# Altium PCB AB-Amplifier.PcbDoc
Units mil, origin at the board's own origin, x right, y up, seen from the top; angles counter-clockwise.
Board outline 6000 x 4000 mil, 2 copper layers (Top Layer, Bottom Layer); 50 components, 32 nets, 113 pads, 0 vias.
Unrouted connection lines stored in the file: 73.
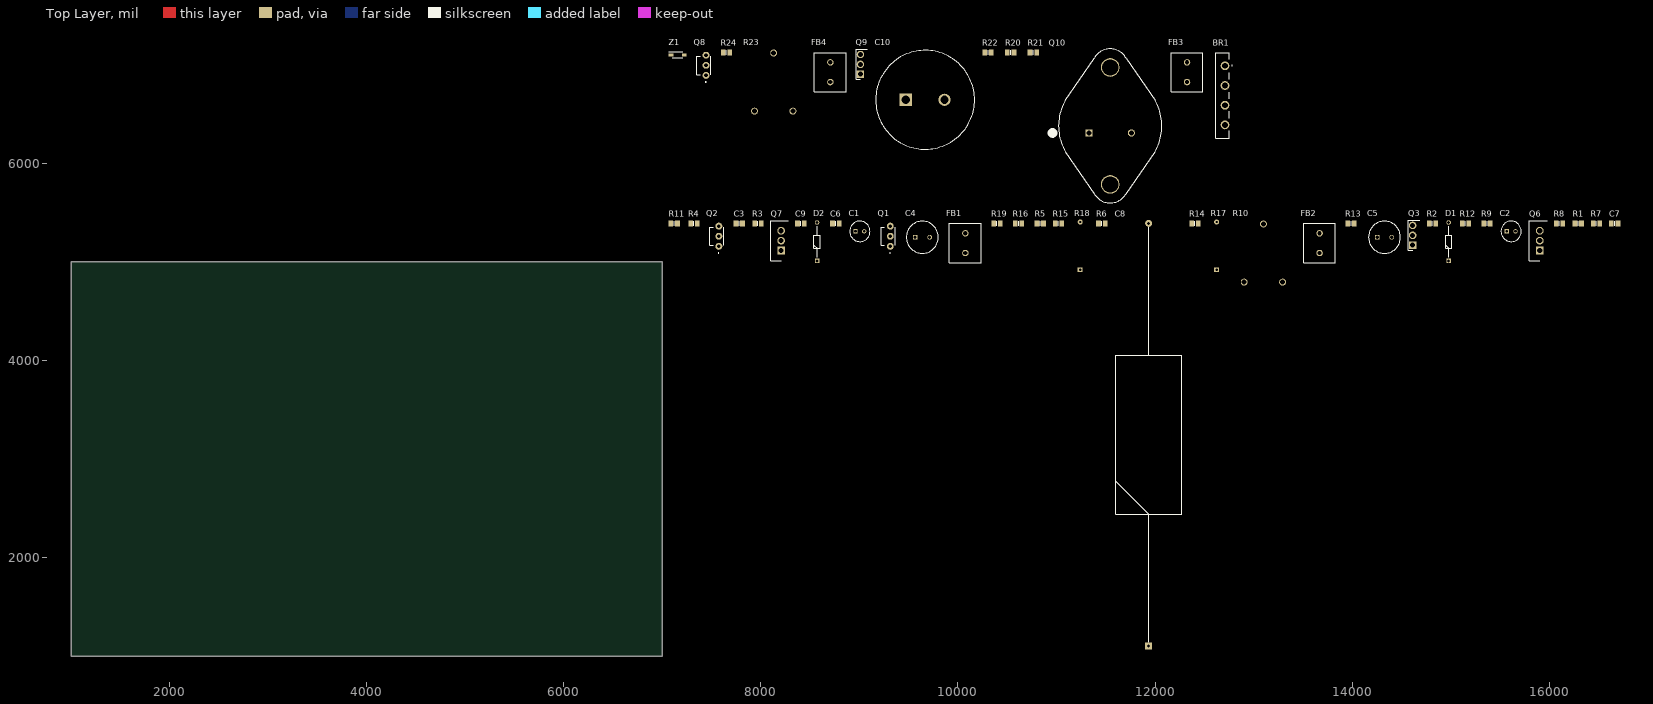
[diagram p0: Top Layer view]
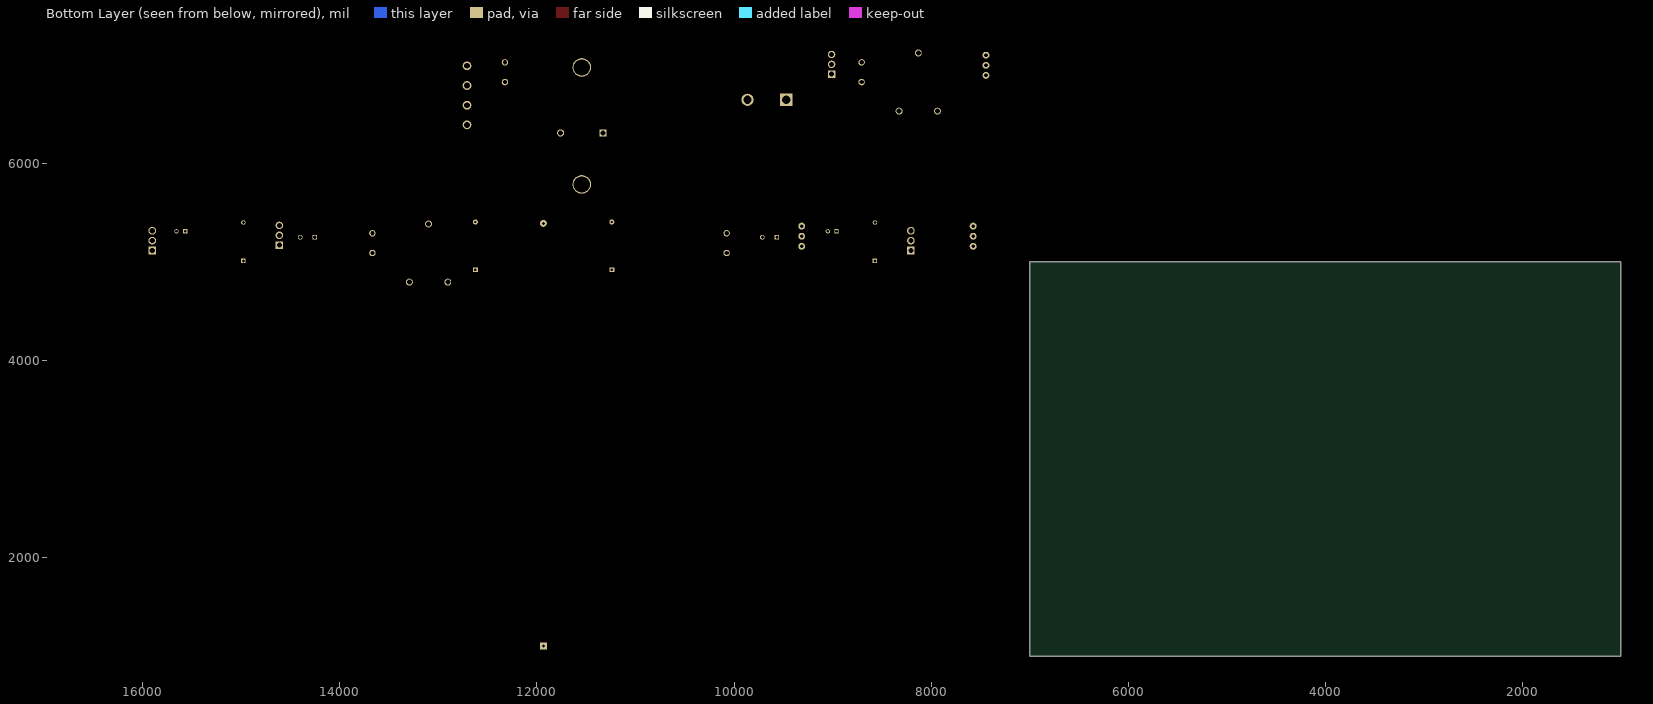
[diagram p1: Bottom Layer view, seen from below]

## Layer stack, top to bottom
Top Solder: solder mask 0.4, Solder Resist, Dk 3.5
Top Layer: signal copper 1.4
Dielectric 1: dielectric 12.6, FR-4, Dk 4.8
Bottom Layer: signal copper 1.4
Bottom Solder: solder mask 0.4, Solder Resist, Dk 3.5

## Board outline
1000,1000 7000,1000 7000,5000 1000,5000

## Design rules (kind name [scope] priority, off if disabled: settings)
Clearance [All] p1: gap=10 ignorepadtopadclearanceinfootprint=FALSE
PolygonConnect [All] p1: connectstyle=Relief reliefconductorwidth=10 reliefentries=4 polygonreliefangle="90 Angle" airgapwidth=10
RoutingVias [All] p1: holewidth=28 width=50 viastyle="Through Hole" minholewidth=28 minwidth=50 maxholewidth=28 maxwidth=50
SolderMaskExpansion [All] p1: expansion=4 istentingtop=FALSE
SupplyNets "Schematic Supply Nets_1" [InNet('GND')] p1: voltage=0.000
SupplyNets "Schematic Supply Nets" [InNet('VCC')] p2: voltage=0.000
Width [All] p1: maxlimit=10 minlimit=10 preferedwidth=10
30 further rules are at their usual default settings.

## Classes and differential pairs
component class Voeding: BR1 C10 FB3 FB4 Q8 Q9 Q10 R20 R21 R22 R23 R24 Z1
component class AB_Amplifier: " C8" C1 C2 C3 C4 C5 C6 C7 C9 D1 D2 FB1 FB2 Q1 Q2 Q3 Q4 Q5 Q6 Q7 R1 R2 R3 R4 R5 R6 R7 R8 R9 R10 R11 R12 R13 R14 R15 R16 R17 R18 R19

## Components (designator, comment, footprint, x,y, rotation, side; value= is the part's Value field where it differs from the comment)
BR1 "Bridge Rectifier" GBU4KE351 12710,6990 r90 top
C1 "1.0uF +" 106CKR050M 8960,5310 r0 top
C2 "10uF +" 106CKR050M 15570,5310 r0 top
C3 "47pF" 0805 7780,5390 r0 top
C4 "100uF +" 107CKR050M 9565,5250 r0 top
C5 "100uF +" 107CKR050M 14255,5250 r0 top
C6 "20pF" 0805 8760,5390 r0 top
C7 "0.1 µF" 0805 16665,5390 r0 top
C8 "2200uF +" 2200cap 11935,1100 r90 top
C9 "0.1 µF" 0805 8405,5390 r0 top
C10 "4700uF +" "Elco 4700uF" 9470,6645 r0 top
D1 "1N4148" 1N4148 14980,5010 r90 top
D2 "1N4148" 1N4148 8570,5010 r90 top
FB1 "Connector" Connector 10075,5090 r90 top
FB2 "Connector" Connector 13670,5090 r90 top
FB3 "Connector" Connector 12325,6825 r90 top
FB4 "Connector" Connector 8705,6825 r90 top
Q1 "BC557CG" BC557 9290,5225 r90 top
Q2 "BC547BG" BC547 7550,5225 r90 top
Q3 "BD139G" BD139 14615,5170 r90 top
Q6 "BDW93C" BDW94C 15905,5115 r90 top
Q7 "BDW94C" BDW94C 8205,5115 r90 top
Q8 "BC547BG" BC547 7420,6960 r90 top
Q9 "BD139G" BD139 9010,6905 r90 top
Q10 "2N3055A" 2N3055 11545,6380 r90 top
R1 "47K" 0805 16295,5390 r0 top
R2 "220K" 0805 14815,5390 r0 top
R3 "120K" 0805 7970,5390 r0 top
R4 "1.2K" 0805 7320,5390 r0 top
R5 "120Ω" 0805 10835,5390 r0 top
R6 "10K" 0805 11460,5390 r0 top
R7 "1.8K" 0805 16480,5390 r0 top
R8 "1.8K" 0805 16105,5390 r0 top
R9 "2K" 0805 15370,5390 r0 top
R10 "5K" "Potentiometer 15mm" 13100,5090 r0 top
R11 "12Ω" 0805 7120,5390 r0 top
R12 "390Ω" 0805 15150,5390 r0 top
R13 "180Ω" 0805 13990,5390 r0 top
R14 "470Ω" 0805 12405,5390 r0 top
R15 "470Ω" 0805 11020,5390 r0 top
R16 "180Ω" 0805 10615,5390 r0 top
R17 "0.33Ω" "0.33 1W" 12625,4920 r90 top
R18 "0.33Ω" "0.33 1W" 11240,4920 r90 top
R19 "10Ω" 0805 10395,5390 r0 top
R20 "1.5K" 0805 10535,7125 r0 top
R21 "22K" 0805 10765,7125 r0 top
R22 "3.3K" 0805 10305,7125 r0 top
R23 "1K" "Potentiometer 15mm" 8130,6825 r0 top
R24 "1.8K" 0805 7650,7125 r0 top
Z1 "Zener Diode 15V" "Zener Diode" 7155,7100 r0 top

## Footprints (in the part's own frame and the unit in brackets; to place one, negate y for a bottom-side part, rotate by r counter-clockwise, add the part's x,y. Pads: shape width x height; smd on the part's side, far side on the other; paste and mask are expansions set on the pad)
"0.33 1W" [mm]
  rect 1.27x1.27 hole 0.6: 1(0,0)
  round 1.27 hole 0.6: 2(12.319,0)
  body extent 1.14,-1.78 11.18,1.78, height 0.25
1N4148 [mm]
  rect 1.15x1.15 hole 0.75: 1(0,0)
  round 1.15 hole 0.75: 2(9.9,0)
  silkscreen extent 0.92,-0.81 8.98,0.81, body extent -0.28,-0.87 10.18,0.87, height 1.75
2N3055 [mm] "TO-204, Pin Spacing 10.92mm, Lead Dia. 1.09 mm (max)"
  rect 1.85x1.85 hole 1.35: 1(-1.815,5.46)
  round 1.85 hole 1.35: 2(-1.815,-5.46)
  round 4.8 hole 4.19 mask+0.102: 3(-15.075,0) 4(15.075,0)
  silkscreen extent -19.85,-13.33 19.85,15.5, body extent -19.84,-13.33 19.84,13.33, height 8.51
106CKR050M [mm] "10uF"
  rect 1.1x1.1 hole 0.7: 1(0,0)
  round 1.1 hole 0.7: 2(2.25,0)
  silkscreen extent -1.5,-2.62 3.75,2.62, body extent -1.61,-2.75 3.88,2.75, height 12.5
107CKR050M [mm] "100uF"
  rect 1.2x1.2 hole 0.8: 1(0,0)
  round 1.2 hole 0.8: 2(3.75,0)
  silkscreen extent -2.25,-4.12 6,4.12, body extent -2.36,-4.25 6.12,4.25, height 13
0805 [mm]
  rect 1.2x1.45 smd: 1(-0.85,0) 2(0.85,0)
  silkscreen extent 0,-0.53 0,0.53, body extent -1,-0.63 1,0.63, height 1.05
2200cap [mil]
  rect 70x70 hole 31.5: 1(0,0)
  round 70 hole 31.5: 2(4291.34,0)
  silkscreen extent 37,-335 4254,335, body extent -12,-354 4303,354, height 708
BC547 [mm]
  round 1.778 hole 0.96: 1(-1.7,-0.585) 2(0.9,-0.585) 3(3.5,-0.585)
  silkscreen extent -3.5,-1.81 3.28,1.81, body extent -2.2,-2.42 3.96,1.71, height 8.67
BC557 [mm]
  round 1.778 hole 0.96: 1(-1.7,-0.585) 2(0.9,-0.585) 3(3.5,-0.585)
  silkscreen extent -3.5,-1.81 3.28,1.81, body extent -2.2,-2.42 3.96,1.71, height 8.67
BD139 [mm]
  rect 1.92x1.92 hole 1.28: 1(0,0)
  round 1.92 hole 1.28: 2(2.54,0) 3(5.08,0)
  silkscreen extent -1.36,-1.77 6.44,1.13, body extent -1.16,-1.27 6.24,1.13, height 13.08
BDW94C [mm]
  rect 1.98x1.98 hole 1.32: 1(0,0)
  round 1.98 hole 1.32: 2(2.55,0) 3(5.1,0)
  silkscreen extent -2.65,-1.88 7.75,2.72, body extent -2.55,-1.88 7.65,2.72, height 20.08
Connector [mm]
  round 1.65 hole 1.1: 1(0,0) 2(5.08,0)
  silkscreen extent -2.54,-4.1 7.62,4.1, body extent -2.51,-4.11 8.25,4.09, height 9.84
"Elco 4700uF" [mm]
  rect 3.15x3.15 hole 2.1: 1(0,0)
  round 3.15 hole 2.1: 2(10,0)
  silkscreen extent -7.75,-12.75 17.75,12.75, body extent -8,-13 18,13, height 32
GBU4KE351 [mm] "Bridge Rectifier"
  round 2.235 hole 1.49: 1(0,0) 2(-5.08,0) 3(-10.16,0) 4(-15.24,0)
  silkscreen extent -18.64,-1.9 3.4,2.32, body extent -18.64,-1.11 3.4,2.32, height 18.9
"Potentiometer 15mm" [mil]
  round 70 hole 51.18: 1(-195,-295) 2(0,295) 3(195,-295)
  body extent -320,-349 320,345, height 10
"Zener Diode" [mm]
  rect 1.2x0.75 smd: 1(-1.7,0) 2(1.7,0)
  silkscreen extent -2.3,-0.77 1.35,0.77, body extent -1.85,-0.89 1.85,0.89, height 1

## Part data
BR1: library part GBU4K-E3_51, Arrow Part Number=GBU4K-E3/51, Manufacturer_Name=Vishay, Mouser Part Number=625-GBU4K-E3/51, Arrow Price/Stock=https://www.arrow.com/en/products/gbu4k-e351/vishay?region=europe, Datasheet Link=https://4donline.ihs.com/images/VipMasterIC/IC/VISH/VISH-S-A0001811512/VISH-S-A0001811512-1.pdf?hkey=6D3A4C79FDBF58556ACFDE234799DDF0, Height=18.8mm, Manufacturer_Part_Number=GBU4K-E3/51, Mouser Price/Stock=https://www.mouser.co.uk/ProductDetail/Vishay-General-Semiconductor/GBU4K-E3-51?qs=nHKQP18abP9%2FYmEys%252Budwg%3D%3D
C1: library part "Elco - 1.0uF"
C2: library part "Elco - 10uF"
C3 C6 C7 C9: library part "Capasitor - 0805"
C4 C5: library part "Elco - 100uF"
C8: library part "Elco - 2000uF"
C10: library part "Elco 4700uF"
D1 D2: library part "Diode - 1N4148", "Fast Switching Diode, 100 V, 0.15 A, -65 to 150 degC, 2-Pin?SOD123, RoHS, Tape and Reel", If - Forward Current=0.15A, Ir - Reverse Current=1uA, Manufacturer=DiodesIncorporated, Max Surge Current=2A, Maximum Operating Temperature=+150C, Minimum Operating Temperature=-65C, Operating Temperature Range=-65Cto+150C, Package / Case=SOD-123, Package Reference=SOD123-2, Peak Reverse Voltage=100V, Vf - Forward Voltage=1.25V, Brand=DiodesIncorporated, Configuration=Single, Datasheet URL=http://www.farnell.com/datasheets/1915529.pdf, Datasheet Version="Rev. 24-2, 10/2013", Factory Pack Quantity=3000, Height=1.25mm, Length=2.85mm, Manufacturer URL=http://www.diodes.com/, Mounting Style=SMD/SMT, Package URL=http://www.diodes.com/datasheets/ds18004.pdf, Packaging=Reel, Product=SwitchingDiodes, Product Category=Diodes-GeneralPurpose,Power,Switching, Recovery Time=4ns, RoHS=True, Series=1N4148, Type=SwitchingDiode, Unit Weight=0.000353oz, Width=1.7mm
FB1 FB2 FB3 FB4: "Ferrite Bead", Arrow Part Number=ACML-0805-500-T, Manufacturer_Name=ABRACON, Mouser Part Number=815-ACML-0805-500T, Arrow Price/Stock=https://www.arrow.com/en/products/acml-0805-500-t/abracon, Datasheet Link=https://abracon.com/Magnetics/new/ACML-0805.pdf, Height=1.05mm, Manufacturer_Part_Number=ACML-0805-500-T, Mouser Price/Stock=https://www.mouser.co.uk/ProductDetail/ABRACON/ACML-0805-500-T?qs=qw2lGDycG5tBjukxHQX6NA%3D%3D
Q1: library part "Transistor - BC557_1", "Amplifier Transistor, PNP Silicon, 3-Pin TO-92, Pb-Free, Bulk Box", Manufacturer="On Semiconductor", ComponentLink1Description="Manufacturer URL", ComponentLink1URL=http://www.onsemi.com/, ComponentLink2Description=Datasheet, ComponentLink2URL=http://www.onsemi.com/pub_link/Collateral/BC556B-D.PDF, ComponentLink3Description="Package Specification", ComponentLink3URL=http://www.onsemi.cn/pub_link/Collateral/2N6426-D.PDF, DatasheetVersion="Rev. 3", IC Continuous (A)=-0.1, Mounting Technology="Through Hole", PackageDescription="3-Pin Transistor Outline, Body 4.825 x 3.685 mm, Pitch 1.27 mm", PackageReference=TO-92-3-29-11_AM_SL, PackageVersion="Rev. AM", Packing="Bulk Box", PartNumber=BC557CG, Polarity=PNP, RoHS=TRUE
Q2: library part "Transistor - BC547_1", "Amplifier Transistor, NPN Silicon, 3-Pin TO-92, Pb-Free, Bulk Box", Manufacturer="On Semiconductor", ComponentLink1Description="Manufacturer URL", ComponentLink1URL=http://www.onsemi.com/, ComponentLink2Description=Datasheet, ComponentLink2URL=http://www.onsemi.com/pub_link/Collateral/BC546-D.PDF, ComponentLink3Description="Package Specification", ComponentLink3URL=http://www.onsemi.cn/pub_link/Collateral/2N6426-D.PDF, DatasheetVersion="Rev. 7", fT Min (MHz)=150, IC Continuous (A)=0.1, Mounting Technology="Through Hole", PackageDescription="3-Pin Transistor Outline, Body 4.825 x 3.685 mm, Pitch 1.27 mm", PackageReference=TO-92-3-29-11_AM_SL, PackageVersion="Rev. AM", Packing="Bulk Box", PartNumber=BC547BG, Polarity=NPN, RoHS=TRUE
Q3 Q9: library part "Transistor - BD139", Case/Package=TO-225, Collector Base Voltage (VCBO)=80V, Collector Emitter Saturation Voltage=500mV, Current Rating=1.5A, Emitter Base Voltage (VEBO)=5V, Manufacturer Lifecycle Status=ACTIVE, Max Junction Temperature (Tj)=150°C, Max Power Dissipation=1.25W, Min Operating Temperature=-55°C, Collector Emitter Breakdown Voltage=80V, Collector Emitter Voltage (VCEO)=80V, Contact Plating=Tin, Element Configuration=Single, Height=11.04mm, hFE Min=25, Lead Free="Lead Free", Length=7.74mm, Lifecycle Status=Production, Max Collector Current=1.5A, Max Operating Temperature=150°C, NexarPartId=354669, Number of Elements=1, Number of Pins=3, Packaging=Bulk, Polarity=NPN, Power Dissipation=1.25W, Radiation Hardening=No, REACH SVHC="No SVHC", RoHS=Compliant, Schedule B="8541290080, 8541290080|8541290080, 8541290080|8541290080|8541290080, 8541290080|8541290080|8541290080|8541290080", Voltage Rating (DC)=80V, Weight=4.535924g, Width=2.66mm
Q6: library part "Transistor - BDW93C", "BDW93C BDW93C Series 100 V 12 A 80 W NPN Darlington Transistor - TO-220-3", Case/Package=TO-220-3, Collector Base Voltage (VCBO)=100V, Collector Emitter Saturation Voltage=2V, Current Rating=12A, Emitter Base Voltage (VEBO)=12V, Manufacturer Lifecycle Status="LAST SHIPMENTS", Max Junction Temperature (Tj)=150°C, Max Power Dissipation=80W, Min Operating Temperature=-65°C, Collector Emitter Breakdown Voltage=100V, Collector Emitter Voltage (VCEO)=100V, Contact Plating=Tin, Element Configuration=Single, Height=9.4mm, hFE Min=750, Lead Free="Lead Free", Length=10.1mm, Lifecycle Status=EOL, Max Collector Current=12A, Max Operating Temperature=150°C, Mount="Through Hole", NexarPartId=84324666, Number of Elements=1, Number of Pins=3, Packaging=Bulk, Polarity=NPN, Power Dissipation=80W, Radiation Hardening=No, REACH SVHC="No SVHC", RoHS=Compliant, Schedule B="8541290080, 8541290080|8541290080, 8541290080|8541290080|8541290080, 8541290080|8541290080|8541290080|8541290080", Voltage Rating (DC)=100V, Weight=1.8g, Width=4.7mm
Q7: library part "Transistor - BDW94C", "Transistor BJT PNP", Manufacturer_Name=STMicroelectronics, Mouser Part Number=511-BDW94C, Arrow Part Number=BDW94C, Arrow Price/Stock=https://www.arrow.com/en/products/bdw94c/stmicroelectronics?utm_currency=USD&region=nac, Datasheet Link=http://www.st.com/web/en/resource/technical/document/datasheet/CD00000925.pdf, Height=4.6mm, Manufacturer_Part_Number=BDW94C, Mouser Price/Stock=https://www.mouser.co.uk/ProductDetail/STMicroelectronics/BDW94C?qs=ljbEvF4DwOM3QQOPDay3pQ%3D%3D
Q8: library part "Transistor - BC547", "Amplifier Transistor, NPN Silicon, 3-Pin TO-92, Pb-Free, Bulk Box", Manufacturer="On Semiconductor", ComponentLink1Description="Manufacturer URL", ComponentLink1URL=http://www.onsemi.com/, ComponentLink2Description=Datasheet, ComponentLink2URL=http://www.onsemi.com/pub_link/Collateral/BC546-D.PDF, ComponentLink3Description="Package Specification", ComponentLink3URL=http://www.onsemi.cn/pub_link/Collateral/2N6426-D.PDF, DatasheetVersion="Rev. 7", fT Min (MHz)=150, IC Continuous (A)=0.1, Mounting Technology="Through Hole", PackageDescription="3-Pin Transistor Outline, Body 4.825 x 3.685 mm, Pitch 1.27 mm", PackageReference=TO-92-3-29-11_AM_SL, PackageVersion="Rev. AM", Packing="Bulk Box", PartNumber=BC547BG, Polarity=NPN, RoHS=TRUE
Q10: library part 2N3055, "Complementary Silicon High-Power Transistor, 3-Pin TO-204, Tray", Manufacturer="On Semiconductor", ComponentLink1Description="Manufacturer URL", ComponentLink1URL=http://www.onsemi.com/, ComponentLink2Description=Datasheet, ComponentLink2URL=http://www.onsemi.com/pub_link/Collateral/2N3055A-D.PDF, ComponentLink3Description="Package Specification", ComponentLink3URL=http://www.onsemi.com/pub_link/Collateral/1-07.PDF, DatasheetVersion="Rev. 7", fT Min (MHz)=0.8, IC Continuous (A)=15, Mounting Technology="Through Hole", Note1=0, PackageDescription="2-Pin Transistor Outline, Body 39.37 x 26.67 mm, Pitch 10.92 mm", PackageReference=TO-204-3-1-07, PackageVersion="Rev. Z, 05/1988", Packing=Tray, PartNumber=2N3055A, Polarity=NPN, RoHS=FALSE
R1 R2 R3 R4 R5 R6 R7 R8 R9 R11 R12 R13 R14 R15 R16 R19 R20 R21 R22 R24: library part "Resistor 0805", Manufacturer="Vishay Dale", Part Number=CRCW080510R0FKEA
R10 R23: library part Potentiometer, "249FGJSPXB25503KA Res Cermet POT 50K Ohm 20% 1W 1(Elec)/1(Mech)Turn 6.35mm Pin Panel Mount/Through Hole Bulk", Insulation Resistance=1GΩ, Max Operating Temperature=125°C, Min Operating Temperature=-55°C, Power Rating=1W, Resistance=50kΩ, Temperature Coefficient=100ppm/°C, Tolerance=10%, Voltage Rating=224V, Composition="Cermet, Potentiometer", Contact Plating=Tin, Depth=12.7mm, Height=13.11mm, Hole Diameter=9.525mm, Length=12.7mm, Military Standard=Not, Mount="Panel, Through Hole", NexarPartId=42669055, Number of Gangs=1, Number of Turns=1, REACH SVHC=Unknown, RoHS=Compliant, Termination=Pin, Type=Potentiometer, Width=12.7mm
R17 R18: library part "Resistor - 1W Through Hole", Manufacturer="KOA Speer", Part Number=RK73B2ATTD224J
Z1: library part "Zener Diode", "Zener Diode", Arrow Part Number=MMSZ5245B-7-F, Manufacturer_Name="Diodes Incorporated", Mouser Part Number=621-MMSZ5245B-F, Arrow Price/Stock=https://www.arrow.com/en/products/mmsz5245b-7-f/diodes-incorporated?region=nac, Datasheet Link=https://www.diodes.com//assets/Datasheets/ds18010.pdf, Height=1.45mm, Manufacturer_Part_Number=MMSZ5245B-7-F, Mouser Price/Stock=https://www.mouser.co.uk/ProductDetail/Diodes-Incorporated/MMSZ5245B-7-F?qs=cvwh0phLhFKAGvhg07nX2Q%3D%3D

## Nets (pads, with @x,y where several pads share a name; then routed paths per layer and width w, separated by ;. In a path a pad name is that pad's centre, name@x,y a point inside that pad or via, vN(x,y) a via of type N, cw(c..) or ccw(c..) an arc to the next point about the centre after c; other vN are vias at no path point)
GND: BR1.4 C2.1 C3.1 C4.1 C7.1 C9.1 C10.1 FB1.2 FB2.2 FB4.1 R3.1 R4.1 R11.2 R24.1 Z1.2
"Net C8_1": C8.1 FB2.1 R19.1
NetBR1_1: BR1.1 C10.2 Q9.2 Q10.3 Q10.4 R20.2 R21.2
NetBR1_2: BR1.2 FB3.2
NetBR1_3: BR1.3 FB3.1
NetC1_1: C1.1 FB1.1
NetC1_2: C1.2 C3.2 R2.1 R3.2
NetC2_2: C2.2 R1.1 R2.2
NetC4_2: C4.2 R5.1
NetC5_1: C5.1 R6.1 R14.2 R15.1 R17.1 R18.2
NetC5_2: C5.2 R7.1 R8.2
NetC6_1: C6.1 Q2.2 R4.2
NetC6_2: C6.2 D2.2 Q2.1 Q3.1 Q7.1
NetC9_2: C9.2 R19.2
NetD1_1: D1.1 Q3.2 Q6.1 R8.1 R9.2 R12.2
NetD1_2: D1.2
NetD2_1: D2.1
NetFB4_2: FB4.2 Q10.2 R22.2
NetQ2_3: Q2.3 R11.1
NetQ3_3: Q3.3 R9.1 R10.3
NetQ5_2: R15.2 R16.2
NetQ6_3: Q6.3 R12.1 R13.1 R17.2
NetQ8_1: Q8.1 Q9.3 R21.1
NetQ8_2: Q8.2 R23.2
NetQ8_3: Q8.3 R20.1 Z1.1
NetQ9_1: Q9.1 Q10.1
NetR5_2: R5.2 R6.2
NetR13_2: R13.2 R14.1
NetR16_1: R16.1 R18.1
NetR22_1: R22.1 R23.1
NetR23_3: R23.3 R24.2
VCC: C7.2 Q6.2 R1.2 R7.2
pads on no net: C8.2 Q1.1 Q1.2 Q1.3 Q7.2 Q7.3 R10.1 R10.2